# Altium PCB Rsim_V1.0.PcbDoc
Units mil, origin at the board's own origin, x right, y up, seen from the top; angles counter-clockwise.
Board outline 1875 x 1245 mil, 2 copper layers (Top Layer, Bottom Layer); 40 components, 31 nets, 119 pads, 17 vias.
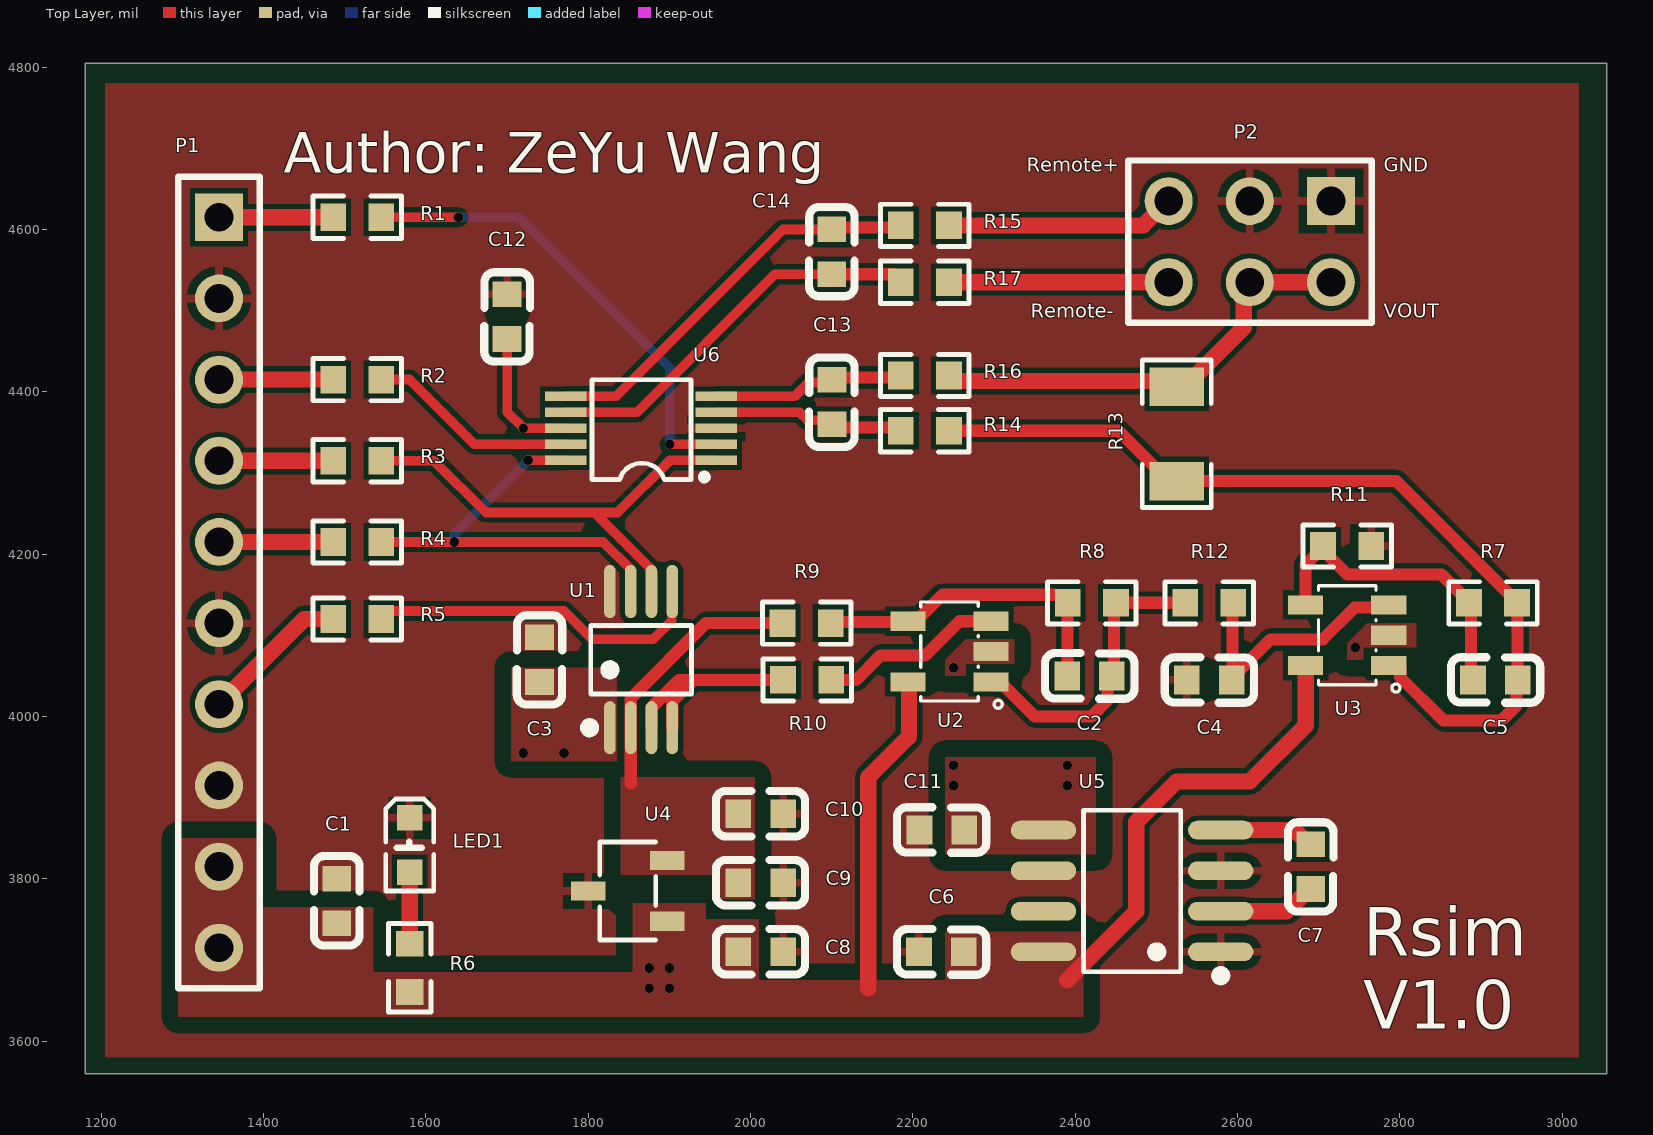
[diagram p0: Top Layer view]
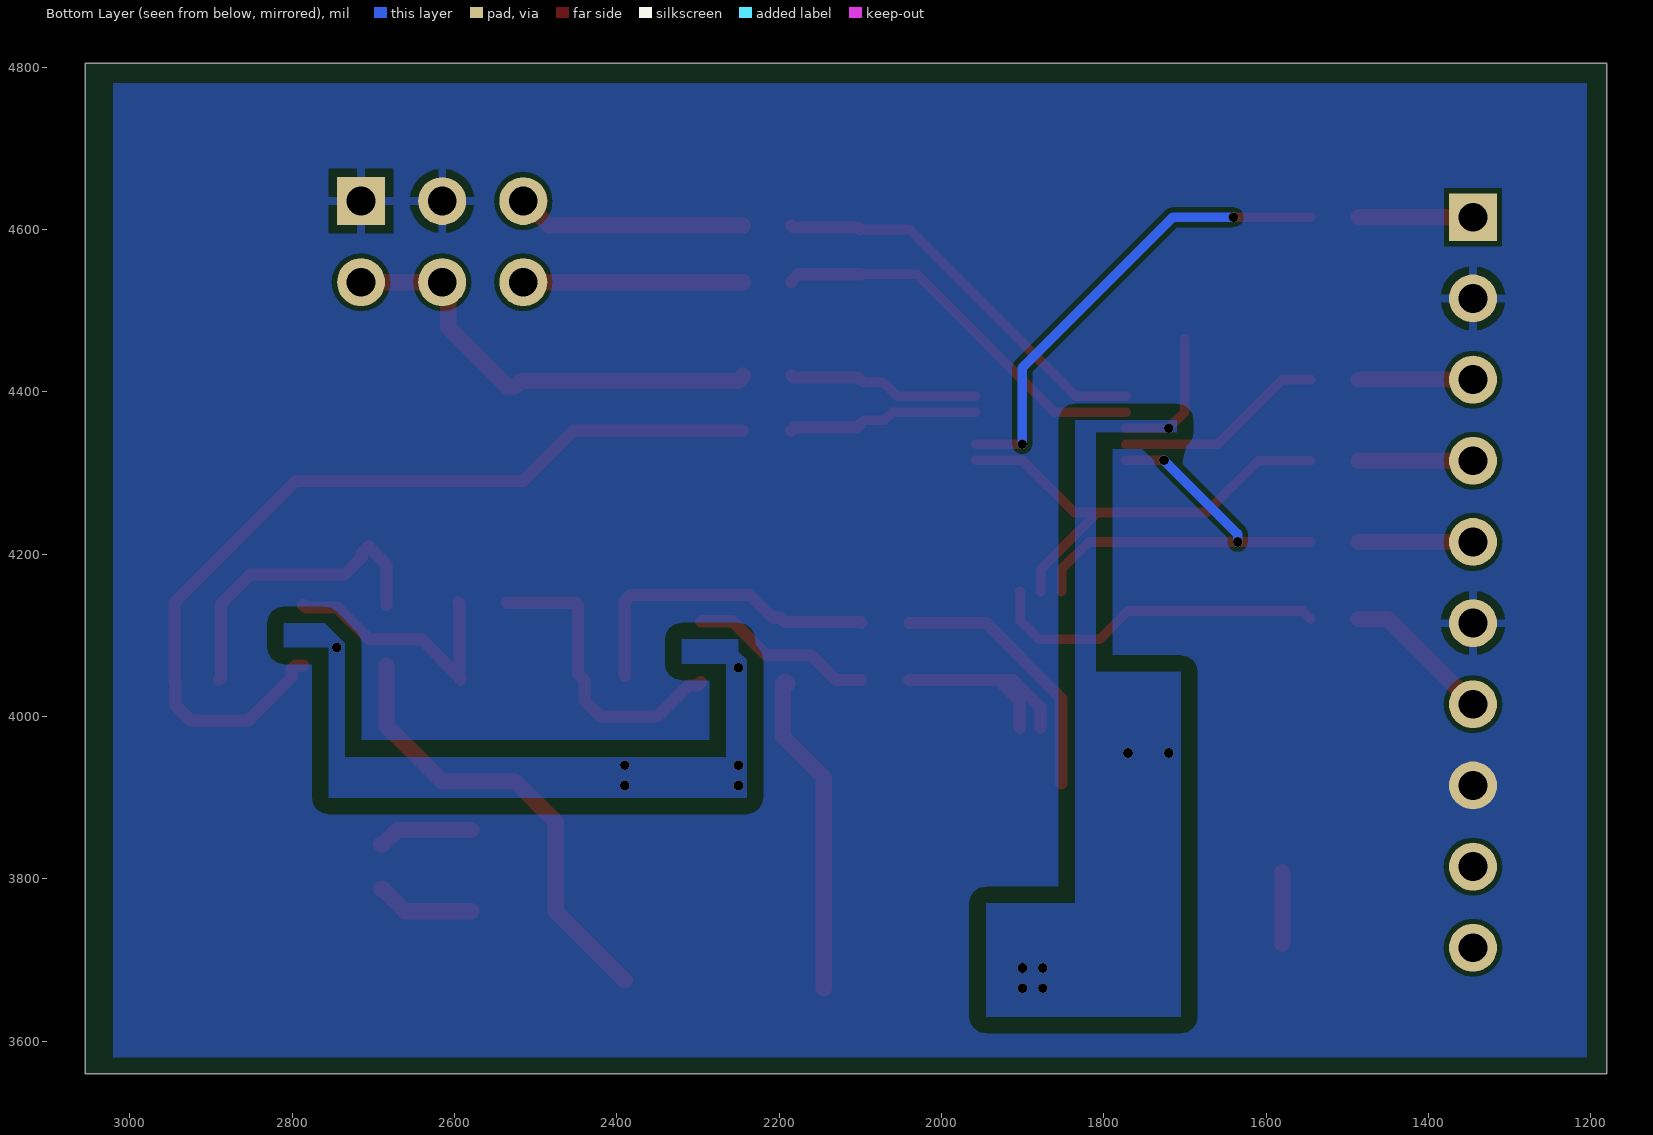
[diagram p1: Bottom Layer view, seen from below]

## Layer stack, top to bottom
Top Solder: solder mask 0.4, Solder Resist, Dk 3.5
Top Layer: signal copper 1.4
Dielectric 1: dielectric 12.6, FR-4, Dk 4.8
Bottom Layer: signal copper 1.4
Bottom Solder: solder mask 0.4, Solder Resist, Dk 3.5

## Board outline
1180,3560 1180,4805 3055,4805 3055,3560

## Design rules (kind name [scope] priority, off if disabled: settings)
Clearance [All] p1: gap=6 ignorepadtopadclearanceinfootprint=TRUE except(20: Fill-Fill Fill-Poly Fill-Region Poly-Poly Poly-Region Region-Region)
MinimumSolderMaskSliver [All] p1: minsoldermaskwidth=2
PolygonConnect [All] p1: connectstyle=Relief reliefconductorwidth=10 reliefentries=4 polygonreliefangle="90 Angle" airgapwidth=10
RoutingVias [All] p1: holewidth=10 width=50 viastyle="Through Hole" minholewidth=10 minwidth=50 maxholewidth=28 maxwidth=50
SilkToSilkClearance [All] p1: silktosilkclearance=4
SilkToSolderMaskClearance [IsPad] p1: minsilkscreentomaskgap=2 clearancetoexposedcopper=TRUE
SolderMaskExpansion [All] p1: expansion=4 istentingtop=FALSE
Width [All] p1: maxlimit=60 minlimit=10 preferedwidth=12
27 further rules are at their usual default settings.

## Components (designator, comment, footprint, x,y, rotation, side; value= is the part's Value field where it differs from the comment)
C1 "100uF" C0603 1490,3772.56 r270 top
C2 "1nF" C0603 2417.44,4050 r180 top
C3 "0.1uF" C0603 1740,4070 r90 top
C4 "1nF" C0603 2565,4045 r180 top
C5 "1nF" C0603 2917.56,4045 r180 top
C6 "0.1uF" C0603 2235,3710 r180 top
C7 "22uF" C0603 2690,3815 r90 top
C8 "0.1uF" C0603 2012.44,3710 r0 top
C9 "10uF" C0603 2012.44,3795 r0 top
C10 "0.1uF" C0603 2012.44,3880 r0 top
C11 "22uF" C0603 2235.61,3860 r0 top
C12 "0.1uF" C0603 1700,4492.56 r90 top
C13 "0.1uF" C0603 2100.21,4387.44 r90 top
C14 "0.1uF" C0603 2100,4572.44 r270 top
LED1 "LED0603R" LED0603-R-RD 1580,3841.5 r270 top
P1 "Header 10" HDR1X10 1345,4615 r270 top
P2 "Header 3X2A" HDR2X3_CEN 2715,4635 r180 top
R1 "33R" R0603 1515.34,4615 r180 top value=10kΩ
R2 "33R" R0603 1515.34,4415 r180 top value=10kΩ
R3 "33R" R0603 1515.34,4315 r180 top value=10kΩ
R4 "33R" R0603 1515.34,4215 r180 top value=10kΩ
R5 "33R" R0603 1515.34,4120 r180 top value=10kΩ
R6 "5K" R0603 1580,3690.34 r270 top value=10kΩ
R7 "10K" R0603 2914.66,4140 r180 top value=10kΩ
R8 "10K" R0603 2420.34,4140 r180 top value=10kΩ
R9 "10K" R0603 2068.98,4115 r180 top value=10kΩ
R10 "50R" R0603 2069.66,4045 r0 top value=10kΩ
R11 "10K" R0603 2735,4210 r0 top value=10kΩ
R12 "100R" R0603 2565,4140 r180 top value=10kΩ
R13 "R1206_shunt 5.1Ω" R1206 2525,4348.22 r90 top value=5mΩ
R14 "18R" R0603 2214.66,4351.97 r0 top value=10kΩ
R15 "18R" R0603 2214.66,4605 r0 top value=10kΩ
R16 "18R" R0603 2214.66,4420 r0 top value=10kΩ
R17 "18R" R0603 2214.66,4535 r0 top value=10kΩ
U1 "DAC8550IDGKR" VSSOP-8_L3.0-W3.0-P0.65-LS5.0-BL 1865,4070 r0 top
U2 "AD8065" SOT-23-5_L3.0-W1.7-P0.95-LS2.8-BR 2245,4080 r0 top
U3 "AD8065" SOT-23-5_L3.0-W1.7-P0.95-LS2.8-BR 2735,4100 r0 top
U4 "REF3025" SOT-23-3_L2.9-W1.6-P1.90-LS2.8-BR 1848.62,3785 r0 top
U5 "LM2663MX" SOIC-8_L4.9-W3.9-P1.27-LS6.0-BL 2470,3785 r90 top
U6 "ADS1118IDGSR" VSSOP-10_L3.0-W3.0-P0.50-LS4.9-BL 1865,4355 r90 top

## Footprints (in the part's own frame and the unit in brackets; to place one, negate y for a bottom-side part, rotate by r counter-clockwise, add the part's x,y. Pads: shape width x height; smd on the part's side, far side on the other; paste and mask are expansions set on the pad)
C0603 [mm]
  rect 0.8x0.9 smd: 1(-0.7,0) 2(0.7,0)
  silkscreen extent -1.41,-0.71 1.39,0.72
HDR1X10 [mm] "Connector; Header; 10 Position"
  rect 1.5x1.5 hole 0.9: 1(0,0)
  round 1.5 hole 0.9: 2(2.54,0) 3(5.08,0) 4(7.62,0) 5(10.16,0) 6(12.7,0) 7(15.24,0) 8(17.78,0) 9(20.32,0) 10(22.86,0)
  silkscreen extent -1.27,-1.27 24.13,1.27
HDR2X3_CEN [mm] "Connector; Header; 3x2 Position"
  rect 1.5x1.5 hole 0.9: 1(0,0)
  round 1.5 hole 0.9: 2(2.54,0) 3(5.08,0) 4(0,2.54) 5(2.54,2.54) 6(5.08,2.54)
  silkscreen extent -1.27,-1.27 6.35,3.81
LED0603-R-RD [mm]
  rect 0.8x0.8 smd: 1(0.851,0) 2(-0.851,0)
  silkscreen extent -1.44,-0.75 1.44,0.75
R0603 [mil]
  rect 31.75x34.02 smd paste-3937.01 mask+2: 1(-29.66,0) 2(29.66,0)
  silkscreen extent -55,-26 55,26
R1206 [mil]
  rect 47.54x66.97 smd paste-3937.01 mask+2: 1(-58.22,0) 2(58.22,0)
  silkscreen extent -91,-42 91,42
SOIC-8_L4.9-W3.9-P1.27-LS6.0-BL [mm]
  oval 0.588x2.045 smd: 1(-1.905,-2.772) 2(-0.635,-2.772) 3(0.635,-2.772) 4(1.905,-2.772) 5(1.905,2.772) 6(0.635,2.772) 7(-0.635,2.772) 8(-1.905,2.772)
  silkscreen extent -2.8,-2.92 2.53,1.52
SOT-23-3_L2.9-W1.6-P1.90-LS2.8-BR [mm]
  rect 1.07x0.6 smd: 1(1.235,-0.95) 2(1.235,0.95) 3(-1.235,0)
  silkscreen extent -0.88,-1.54 0.88,1.54
SOT-23-5_L3.0-W1.7-P0.95-LS2.8-BR [mm]
  rect 1.1x0.6 smd: 1(1.3,-0.95) 2(1.3,0) 3(1.3,0.95) 4(-1.3,0.95) 5(-1.3,-0.95)
  silkscreen extent -0.9,-1.78 1.65,1.55
VSSOP-8_L3.0-W3.0-P0.65-LS5.0-BL [mil]
  oval 14.33x65.43 smd: 1(-38.39,-83.9) 2(-12.79,-83.9) 3(12.8,-83.9) 4(38.39,-83.9) 5(38.39,83.9) 6(12.8,83.9) 7(-12.79,83.9) 8(-38.39,83.9)
  silkscreen extent -69,-90 62,42
VSSOP-10_L3.0-W3.0-P0.50-LS4.9-BL [mm]
  rect 0.3x1.3 smd paste+0 mask+0.015: 1(-1,-2.35) 2(-0.5,-2.35) 3(0,-2.35) 4(0.5,-2.35) 5(1,-2.35)
  rect 0.3x1.3 smd: 6(1,2.35) 7(0.5,2.35) 8(0,2.35) 9(-0.5,2.35) 10(-1,2.35)
  silkscreen extent -1.62,-2.08 1.52,1.54

## Part data
C1 C2 C3 C4 C5 C6 C7 C8 C9 C10 C11 C12 C13 C14: library part 0603CAP, JLCPCB Part Class="Extended Part", LCSC Part Name=贴片电容, Manufacturer=FH(风华), Manufacturer Part=0603DS475K160NT, Add into BOM=yes, Convert to PCB=yes, Datasheet=https://atta.szlcsc.com/upload/public/pdf/source/20220211/3FDF6092789FC56E23A16E03DC7301F9.pdf, Device=0603DS475K160NT, Supplier=LCSC, Supplier Footprint=0603, Supplier Part=C18213190, Symbol=0603DS475K160NT
LED1: Color Temperature=-, Emitted Color=红色, Forward Current=20mA, JLCPCB Part Class="Extended Part", LCSC Part Name=红灯, Lens Color=无色透明透镜, Manufacturer=yongyu(永裕光电), Manufacturer Part=SZYY0603R, Operating Temperature=-40℃~+85℃, Power Dissipation=40mW, Add into BOM=yes, Convert to PCB=yes, Datasheet=https://atta.szlcsc.com/upload/public/pdf/source/20191204/C434419_0B955C1F73FF88449D9A795B6FF49070.pdf, Device=SZYY0603R, Diode Configuration=-, Dominant Wavelength=615nm~630nm, Mounting Sytle=-, Peak Wavelength=645nm, Supplier=LCSC, Supplier Footprint=0603, Supplier Part=C434419, Symbol=SZYY0603R, Viewing Angle=120°
P1: "Header, 10-Pin", LatestRevisionDate=17-Jul-2002, LatestRevisionNote="Re-released for DXP Platform.", Publisher="Altium Limited"
P2: "Header, 3-Pin, Dual row", LatestRevisionDate=17-Jul-2002, LatestRevisionNote="Re-released for DXP Platform.", Publisher="Altium Limited"
R1 R2 R3 R4 R5 R6 R7 R8 R9 R10 R11 R12 R14 R15 R16 R17: library part 0603RES, JLCPCB Part Class="Basic Part", LCSC Part Name="厚膜电阻 10kΩ ±1% 100mW", Manufacturer=UNI-ROYAL(厚声), Manufacturer Part=0603WAF1002T5E, Operating Temperature Range=-55℃~+155℃, Overload Voltage (Max)=75V, Power(Watts)=100mW, Temperature Coefficient=±100ppm/℃, Tolerance=±1%, Add into BOM=yes, Convert to PCB=yes, Datasheet=https://atta.szlcsc.com/upload/public/pdf/source/20200306/C422600_1E6D84923E4A46A82E41ADD87F860B5C.pdf, Device=0603WAF1002T5E, Supplier=LCSC, Supplier Footprint=0603, Supplier Part=C25804, Symbol=0603WAF1002T5E, Type=厚膜电阻
R13: library part R1206_shunt, JLCPCB Part Class="Extended Part", LCSC Part Name="5mΩ ±1% 1W", Manufacturer=Milliohm(毫欧), Manufacturer Part=HoLLR1206-1W-5mR-1%, Power(Watts)=1W, Rated Current=31.6A, Rated Output Voltage=-, Temperature Coefficient=±50ppm/℃, Tolerance=±1%, Add into BOM=yes, Convert to PCB=yes, Datasheet=https://atta.szlcsc.com/upload/public/pdf/source/20220407/F189C92CC2C10DCB4BF36375122B9E11.pdf, Device=HoLLR1206-1W-5mR-1%, Mounting Sytle=贴片, Supplier=LCSC, Supplier Footprint=1206, Supplier Part=C2988648, Symbol=HOLLR1206-1W-5MR-1%, Type=采样电阻
U1 U6: JLCPCB Part Class="Extended Part", Manufacturer=TI(德州仪器), Add into BOM=yes, Convert to PCB=yes, Supplier=LCSC
  U1: Datasheet=https://www.ti.com/cn/lit/gpn/dac8550, Device=DAC8550IDGKR, LCSC Part Name=DAC8550IDGKR, Manufacturer Part=DAC8550IDGKR, Supplier Footprint=VSSOP-8-0.65mm, Supplier Part=C2868131, Symbol=DAC8550IDGKR
  U6: Datasheet=https://www.ti.com/cn/lit/gpn/ads1118, Device=ADS1118IDGSR, LCSC Part Name=ADS1118IDGSR, Manufacturer Part=ADS1118IDGSR, Supplier Footprint=VSSOP-10-0.5mm, Supplier Part=C55347, Symbol=ADS1118IDGSR_C55347
U2 U3: library part AD8065ARTZ-REEL7, JLCPCB Part Class="Extended Part", Manufacturer=ADI(亚德诺), Operating Temperature=-40℃~+85℃, Supply Current Per Channel=6.6mA, Add into BOM=yes, Convert to PCB=yes, Datasheet=https://atta.szlcsc.com/upload/public/pdf/source/20190724/C406721_7F0014C6A9B930583CF1868CC468A0F9.pdf, Device=AD8065ARTZ-REEL7, LCSC Part Name=AD8065ARTZ-REEL7, Manufacturer Part=AD8065ARTZ-REEL7, Slew Rate(SR)=180V/us, Supplier=LCSC, Supplier Footprint=SOT-23-5, Supplier Part=C9648, Symbol=AD8065ARTZ-REEL7
U4: library part REF3025AIDBZR, Input Voltage=2.55V~5.5V, JLCPCB Part Class="Extended Part", Manufacturer=TI(德州仪器), Operating Temperature=-40℃~+125℃@(Ta), Output Current=25mA, Output Voltage=2.5V, Supply Current=50uA, Temperature Coefficient=75ppm/℃, Tolerance=±0.2%, Add into BOM=yes, Convert to PCB=yes, Datasheet=https://www.ti.com/cn/lit/gpn/ref3020, Device=REF3025AIDBZR, LCSC Part Name=REF3025AIDBZR, Manufacturer Part=REF3025AIDBZR, Noise - 1/10Hz to 10Hz=28uVp-p, Noise - 10Hz to 10kHz=80uVrms, Output Type=固定, Reference Type=串联, Supplier=LCSC, Supplier Footprint=SOT-23, Supplier Part=C11334, Symbol=REF3025AIDBZR
U5: library part LM2663MX/NOPB, Input Voltage=1.5V~5.5V, JLCPCB Part Class="Extended Part", Manufacturer=TI(德州仪器), Operating Temperature=-40℃~+85℃@(TA), Output Current (Max)=200mA, Output Voltage=-5.5V~-1.5V, Switching Frequency=75kHz；10kHz, Add into BOM=yes, Convert to PCB=yes, Datasheet=https://www.ti.com/cn/lit/gpn/lm2662, Device=LM2663MX/NOPB, Function=-, LCSC Part Name=LM2663MX/NOPB, Manufacturer Part=LM2663MX/NOPB, Number of Outputs=1, Output Type=固定, Supplier=LCSC, Supplier Footprint=SOIC-8, Supplier Part=C73869, Switch tube (built-in/external)=内置, Symbol=LM2663MX/NOPB, Synchronous Rectification=否, Topology=-

## Via types
v1: diameter 12, hole 12, Top Layer to Bottom Layer, 17 vias

## Nets (pads, with @x,y where several pads share a name; then routed paths per layer and width w, separated by ;. In a path a pad name is that pad's centre, name@x,y a point inside that pad or via, vN(x,y) a via of type N, cw(c..) or ccw(c..) an arc to the next point about the centre after c; other vN are vias at no path point)
5V_IN: C1.2 C3.1 C6.1 C8.1 C12.1 P1.9 P1.10 R6.2 U1.1 U2.5 U3.5 U4.1 U5.8 U6.8 | length 1138.8
  Top Layer w12: C12.1 1700,4375 v1(1719.9,4355.1) 1772.39,4355.1 U6.8
  Top Layer w20: 2145,3665 2145,3925 2195,3975 2195,4040.79 2190,4040.79 2191.81,4042.6 U2.5 ; 2390,3675 2475,3760 2475,3870 2525,3920 2615,3920 2683.82,3988.82 U3.5
  other v1: 1875,3665 1900,3665 1875,3690 1900,3690 1720,3955 1770,3955
-5V: C11.2 U2.2 U3.2 U5.5
  other v1: 2250,3915 2390,3915 2250,3940 2390,3940 2250,4060 2745,4085
AIN0: C13.1 R14.1 U6.4 | length 236.9
  Top Layer w12: U6.4 2060.32,4374.69 2070,4365 2095.09,4365 C13.1
  Top Layer w15: C13.1 2104.17,4355.93 2181.05,4355.93 R14.1
AIN1: C13.2 R16.1 U6.5 | length 238.1
  Top Layer w12: U6.5 2054.38,4394.38 2071.53,4411.53 2096.74,4411.53 C13.2
  Top Layer w15: C13.2 2102.71,4417.5 2182.5,4417.5 R16.1
AIN2: C14.1 R15.1 U6.6 | length 499.8
  Top Layer w12: U6.6 1834.37,4394.36 2040,4600 C14.1
  Top Layer w15: C14.1 2102.5,4602.5 2182.5,4602.5 R15.1
AIN3: C14.2 R17.1 U6.7 | length 487.8
  Top Layer w12: U6.7 1859.95,4374.69 2030.15,4544.88 C14.2
  Top Layer w15: C14.2 2176.25,4544.88 2185,4536.13 R17.1
GND: C1.1 C3.2 C4.2 C6.2 C8.2 C9.2 C10.2 C11.1 C12.2 LED1.2 P1.2 P1.6 P1.8 P2.1 P2.2 R11.2 U1.8 U4.3 U5.1 U5.3 U5.6 U6.3
NetC2_1: C2.1 R8.1 R12.2 U2.1 | length 379.2
  Top Layer w15: U2.1 2300.5,4038.29 2311.71,4038.29 2350,4000 2420,4000 2439.86,4019.86 2439.86,4044.86 C2.1 2447.5,4052.5 2447.5,4137.5 R8.1 R12.2
NetC2_2: C2.2 R8.2 R9.1 U2.4 | length 401.7
  Top Layer w15: R9.1 2099.84,4116.2 2192.61,4116.2 2198.13,4121.71 2207.97,4121.71 2236.26,4150 2373.52,4150 2374.01,4149.51 2382.3,4149.51 2390.68,4141.13 R8.2 2390.28,4139.6 2390.28,4050.4 C2.2
NetC5_2: C5.2 R7.2 R11.1 U3.4 | length 389.9
  Top Layer w15: U3.4 2683.82,4187.34 R11.1@2705.34,4208.87 ; R11.1 2713.72,4201.62 2713.72,4196.28 2735,4175 2851.13,4175 2887.5,4138.63 2887.5,4047.5 C5.2
NetC7_1: C7.1 U5.2 | length 122.2
  Top Layer w20: U5.2 2660.59,3760 2688.03,3787.44 C7.1
NetC7_2: C7.2 U5.4 | length 118.1
  Top Layer w20: U5.4 2670.59,3860 2688.03,3842.56 C7.2
NetLED1_1: LED1.1 R6.1 | length 88
  Top Layer w20: R6.1 LED1.1
NetP1_1: P1.1 R1.2 | length 140.7
  Top Layer w20: P1.1 R1.2
NetP1_3: P1.3 R2.2 | length 140.7
  Top Layer w20: P1.3 R2.2
NetP1_4: P1.4 R3.2 | length 140.7
  Top Layer w20: P1.4 R3.2
NetP1_5: P1.5 R4.2 | length 140.7
  Top Layer w20: P1.5 R4.2
NetP1_7: P1.7 R5.2 | length 184.2
  Top Layer w20: P1.7 1450,4120 R5.2
NetR10_2: R10.2 U2.3 | length 226.9
  Top Layer w15: R10.2 2130,4045 2160,4075 2215,4075 2257.4,4117.4 U2.3
Remote+: P2.3 R15.2 | length 283.1
  Top Layer w20: R15.2 2483.76,4605 2513.76,4635 P2.3
Remote-: P2.6 R17.2 | length 270.7
  Top Layer w20: R17.2 P2.6
SHUNT_N: P2.4 P2.5 R13.2 R16.2 | length 558.4
  Top Layer w20: R16.2 2244.32,4419.1 2250.2,4413.22 2518.22,4413.22 R13.2 2534.71,4406.44 2607.53,4479.25 2607.53,4527.53 P2.5 P2.4
SHUNT_P: C5.1 R7.1 R13.1 R14.2 U3.1 | length 1114.4
  Top Layer w15: R14.2 2453.31,4351.97 2515.29,4290 R13.1 2795.45,4290 2944.32,4141.13 R7.1 2944.72,4139.6 2944.72,4044.6 2943.57,4043.45 2943.57,4013.57 2925,3995 2853.79,3995 2800.34,4048.45 2800.34,4058.29 2796.03,4062.6 U3.1
SPI_ADC_CS: R1.1 U6.2 | length 583.6
  Top Layer w12: R1.1 v1(1640,4615) ; v1(1900.32,4335.31) U6.2
  Bottom Layer w12: v1(1640,4615) 1715,4615 1900.32,4429.69 v1(1900.32,4335.31)
SPI_DAC_CS: R5.1 U1.5 | length 422.3
  Top Layer w12: R5.1 1545,4120.12 1554.88,4130 1770,4130 1805,4095 1880,4095 1902.94,4117.94 1902.94,4153.45 U1.5
SPI_MISO: R2.1 U6.9 | length 260.5
  Top Layer w12: R2.1 1580,4415 1659.68,4335.31 U6.9
SPI_MOSI: R4.1 U1.7 U6.10 | length 533.4
  Top Layer w12: R4.1 1818.17,4215 1851.76,4181.4 1851.76,4154.35 U1.7 ; v1(1725.62,4315.62) U6.10
  Bottom Layer w12: v1(1635,4215) 1635,4225 v1(1725.62,4315.62)
SPI_SCK: R3.1 U1.6 U6.1 | length 592
  Top Layer w12: R3.1 1610,4315 1673.81,4251.19 1807.57,4251.19 ; U1.6 1877.35,4154.35 1877.35,4181.41 1807.57,4251.19 ; U6.1 1900.63,4315.64 1836.19,4251.19 1807.57,4251.19
VOUT_1: C4.1 R12.1 U3.3 | length 325.5
  Top Layer w15: C4.1 2592.56,4046.97 C4.1@2593.61,4048.02 ; R12.1 2593.61,4138.95 C4.1@2593.61,4048.02 ; U3.3 2782.94,4134.15 2744.15,4134.15 2705,4095 2640.59,4095 C4.1@2593.61,4048.02
VOUT_D: R10.1 U1.3 U1.4 | length 271.1
  Top Layer w15: U1.3 1877.8,4010.98 1911.82,4045 1930,4045 ; U1.4 1903.39,4018.39 1930,4045 ; R10.1 1930,4045
VREF: C9.1 C10.1 R9.2 U1.2 U4.2 | length 330.5
  Top Layer w15: 1852.21,3917.21 U1.2 1852.21,4022.21 1945,4115 R9.2
pads on no net: U5.7

## Polygon pours and split planes (outlines as drawn)
GND on Top Layer "GND_L01_P020" (solid, remove dead copper, pour order 20): 3020,4780 3020,3580 1205,3580 1205,4780
no net on Top Layer "NONET_L01_P018" (solid, pour order 18): 1185,4840
-5V on Top Layer "-5V_L01_P011" (solid, pour order 11): 2760,4115 2820,4115 2820,4085 2755,4085 2755,4070 2735,4070 2735,4090
-5V on Top Layer "-5V_L01_P007" (solid, pour order 7): 2325,4095 2265,4095 2240,4070 2240,4050 2265,4050 2265,4065 2325,4065
-5V on Top Layer "-5V_L01_P004" (solid, pour order 4): 2240,3830 2425,3830 2425,3950 2240,3950
5V_IN on Top Layer "5V_IN_L01_P003" (solid, pour order 3): 2005,3675 2240,3675 2240,3735 2410,3735 2410,3630 2005,3630
VREF on Top Layer "VREF_L01_P002" (solid, remove dead copper, pour order 2): 2005,3775 1955,3775 1955,3805 1840,3805 1840,3925 2005,3925
5V_IN on Top Layer "5V_IN_L01_P001" (solid, pour order 1): 1705,4060 1835,4060 1835,3945 1705,3945
5V_IN on Top Layer "5V_IN_L01_P000" (solid, pour order 0): 1295,3850 1395,3850 1395,3770 1400,3765 1535,3765 1535,3685 1855,3685 1855,3770 1945,3770 1945,3750 2010,3750 2010,3630 1295,3630
GND on Bottom Layer "GND_L02_P022" (solid, remove dead copper, pour order 22): 1205,4780 3020,4780 3020,3580 1205,3580
5V_IN on Bottom Layer "5V_IN_L02_P017" (solid, pour order 17): 1835,4045 1835,4365 1710,4365 1710,4350 1810,4350 1810,4045
no net on Bottom Layer "NONET_L02_P016" (solid, pour order 16): 1750,3905
no net on Bottom Layer "NONET_L02_P015" (solid, pour order 15): 1750,3905
no net on Bottom Layer "NONET_L02_P014" (solid, pour order 14): 1750,3905
5V_IN on Bottom Layer "5V_IN_L02_P013" (solid, pour order 13): 1705,4055 1835,4055 1835,3770 1945,3770 1945,3630 1705,3630
no net on Bottom Layer "NONET_L02_P012" (solid, pour order 12): 1705,4055
-5V on Bottom Layer "-5V_L02_P010" (solid, pour order 10): 2810,4085 2755,4085 2755,3900 2735,3900 2735,4090 2760,4115 2810,4115
-5V on Bottom Layer "-5V_L02_P006" (solid, pour order 6): 2660,3950 2750,3950 2750,3900 2260,3900 2260,3950
-5V on Bottom Layer "-5V_L02_P005" (solid, remove dead copper, pour order 5): 2320,4095 2250,4095 2250,4080 2240,4070 2240,3900 2265,3900 2265,4065 2320,4065

## Silkscreen, mask and mechanical layers (free items; w line width, h text height)
Top Overlay:
  text "Author: ZeYu Wang" at 1425,4670 h50
  text "Rsim / V1.0" at 2755,3615 h60
Mechanical 1:
  the board outline again, w10

## Text inside footprints (layer, text, board x,y; h text height)
P2: Top Overlay "VOUT" at 2780,4485 h30; Top Overlay "GND" at 2780,4665 h30; Top Overlay "Remote+" at 2340,4665 h30; Top Overlay "Remote-" at 2345,4485 h30